# EAGLE board SingleLED-v1 (EAGLE 7.7.0)
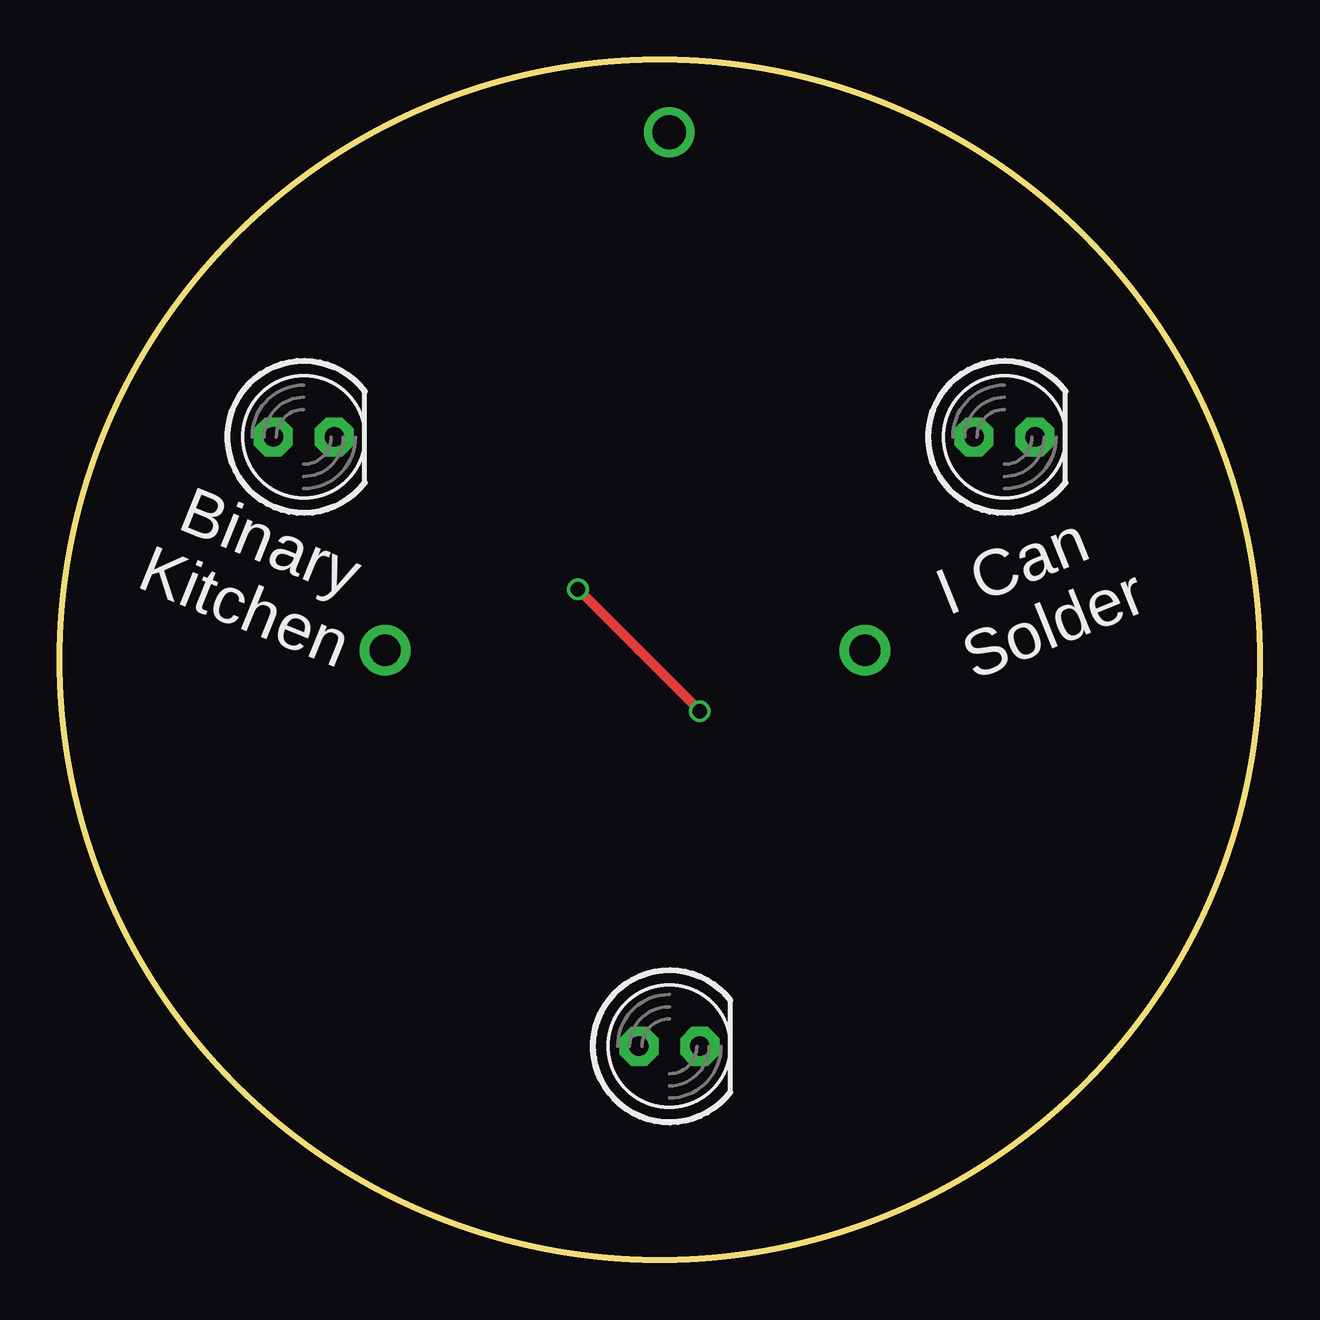
[diagram p0: board, top side]
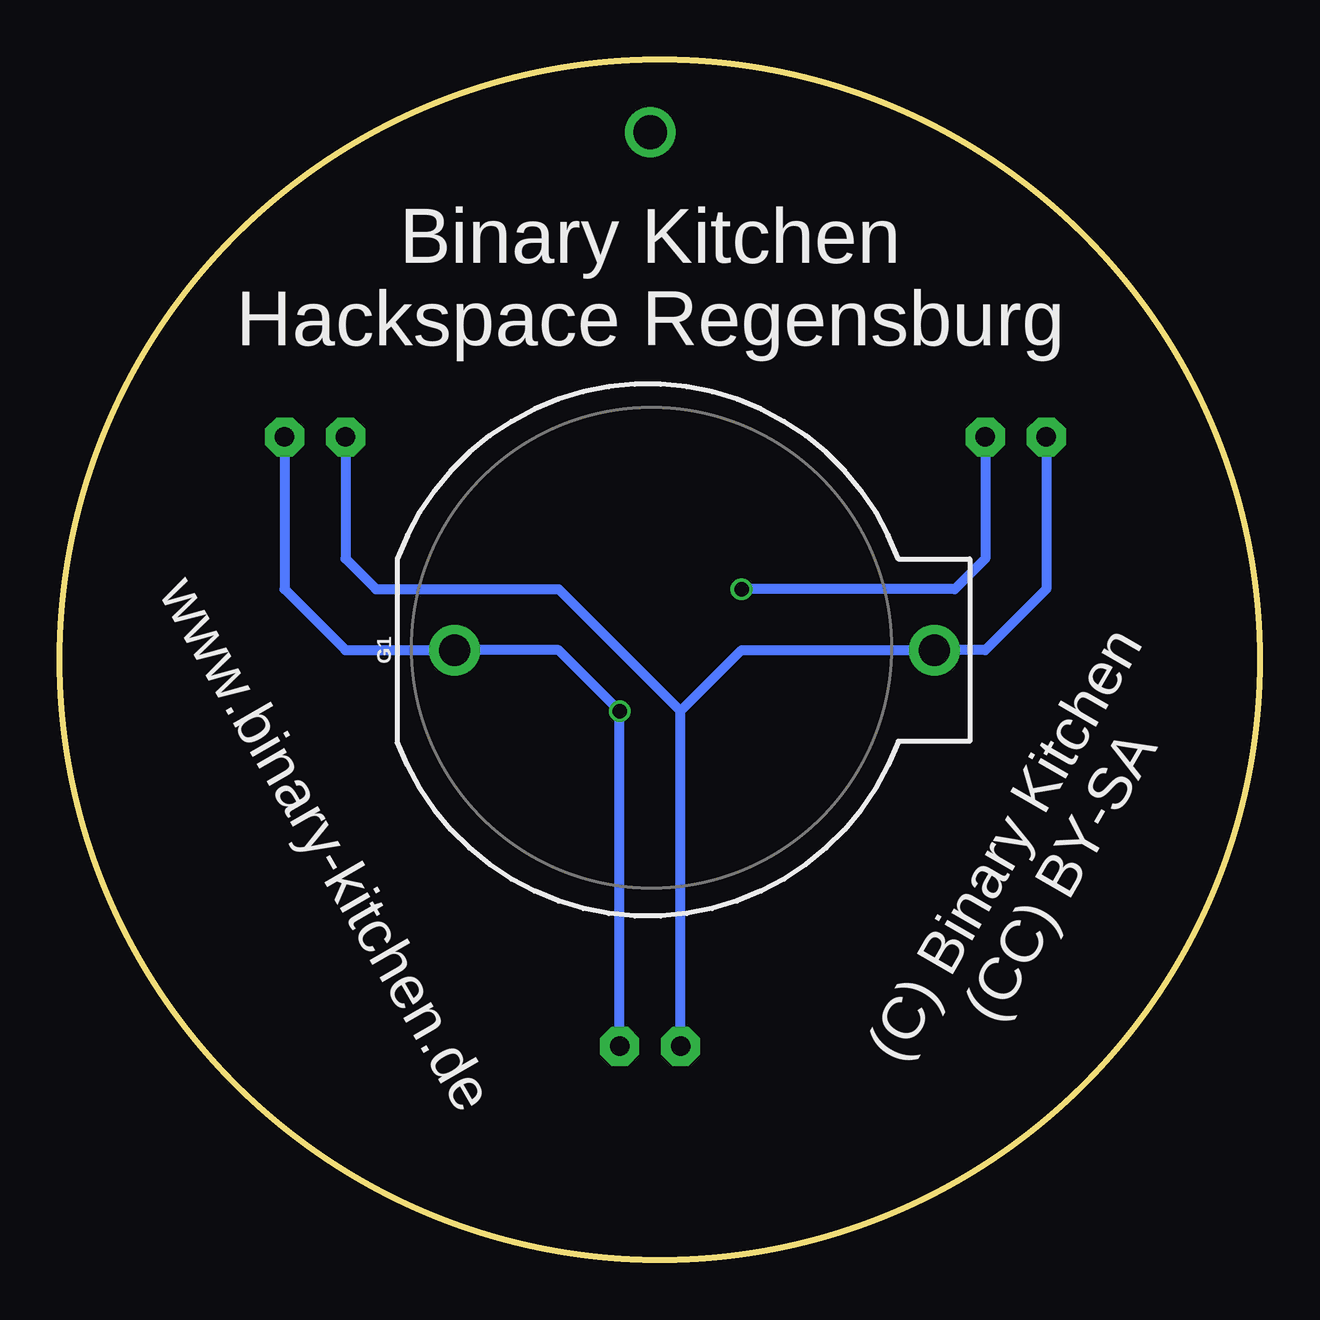
[diagram p1: board, bottom side, seen from below]

Size 50 x 50 mm. Coordinates in mm from the lower left corner, seen from the top.
Outline: circle at 25,25 radius 25
Copper layers (1*16): Top 0.035mm / dielectric 1.5mm / Bottom 0.035mm
Design rules "NOA Eagle Rule 2016-06-12 *": minimum track width 6mil, minimum drill 0.3mm, track to track 6mil, track to pad 6mil, pad to pad 6mil, via to via 6mil, smd to smd 0mil, copper to edge 0.4mm, drill to drill 10mil, minimum pad ring 16mil, minimum via ring 6mil, stop-mask expansion 2mil, vias tented up to drill 25mil, thermal gap 10mil

## Footprints (pad centres in the part's own frame; a part is rotated, then mirrored left to right if it is on the bottom)
BATTCOM_20MM_PTH = drill 1.3: 1 11.85,0; 2 -8.15,0
LED5MM = drill 0.813 octagon: A -1.27,0; K 1.27,0

## Placement (x,y rotation side)
G1  [BATTCOM_20MM_PTH]  25.4,25.4 0 bottom
LED1  [LED5MM]  39.37,34.29 0 top
LED2  [LED5MM]  10.16,34.29 0 top
LED3  [LED5MM]  25.4,8.89 0 top

## Library data of the parts
G1 = SparkFun-Batteries; PROD_ID: BATT-09031; SF_SKU: PRT-00783
LED1-LED3 = led

## Nets
GND: G1.2 LED1.K LED2.K LED3.K
VCC: G1.1 LED1.A LED2.A LED3.A

## Tracks (layer width: path | path; a pad name or v marks a point on that pad's centre or on a via)
GND  (via drill 0.6)
  Top 0.406: v21.59,27.94 24.13,25.4 v26.67,22.86
  Bottom 0.406: LED3.K v26.67,22.86 29.21,25.4 G1.2 38.1,25.4 40.64,27.94 LED1.K | LED2.K 11.43,29.21 12.7,27.94 v21.59,27.94
N$1  (via drill 1.4)
  other vias: 25.4,46.99
VCC
  Bottom 0.406: LED3.A 24.13,22.86 | 24.13,22.86 21.59,25.4 G1.1 11.43,25.4 8.89,27.94 LED2.A | LED1.A 38.1,29.21 36.83,27.94 29.21,27.94 24.13,22.86

## Text on the board
tNames: Binary / Kitchen | I Can / Solder
bNames: Binary Kitchen / Hackspace Regensburg | (C) Binary Kitchen / (CC) BY-SA | www.binary-kitchen.de